# Altium PCB PowerSupplyV2.PcbDoc (part 4 of 4)
Units mm, origin at the board's own origin, x right, y up, seen from the top; angles counter-clockwise.
Board outline 28.17 x 37.01 mm, 2 copper layers (Top Layer, Bottom Layer), stack 0.971 mm thick; 117 components, 81 nets, 421 pads, 118 vias.
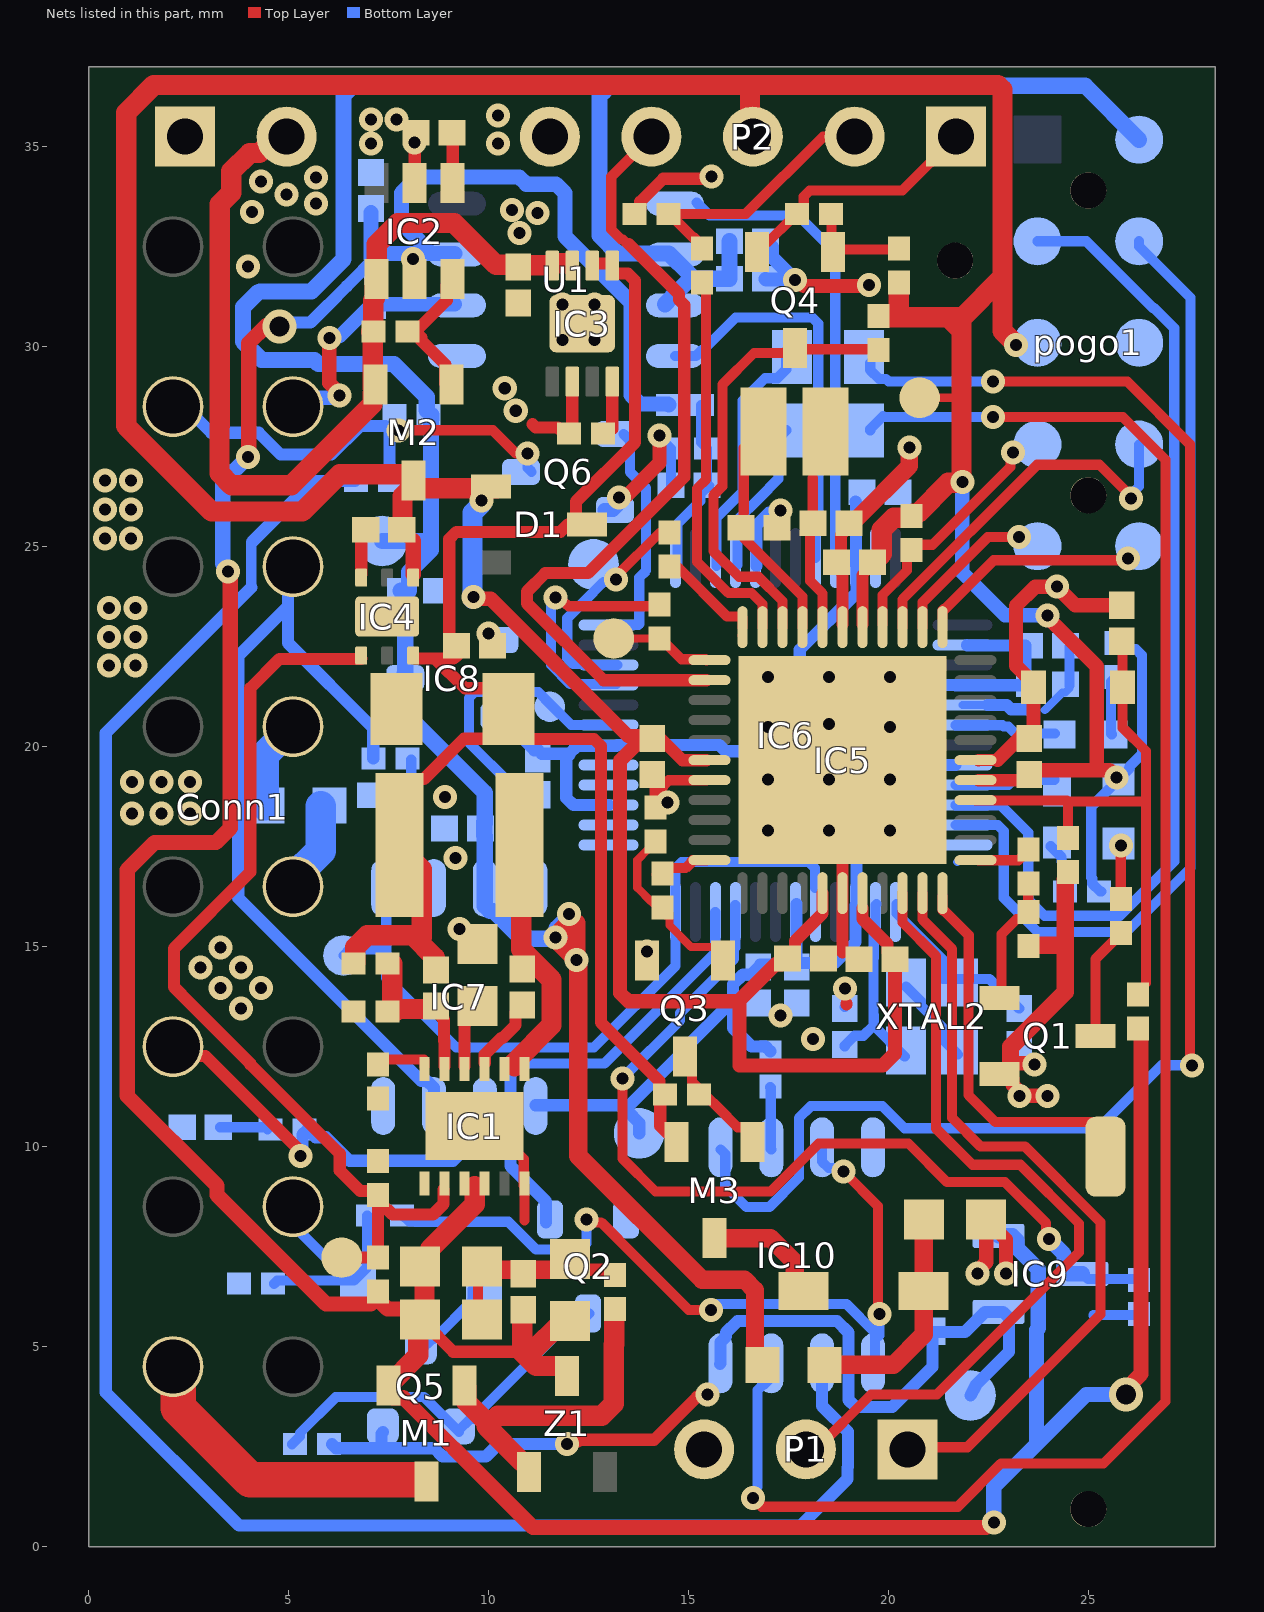
[diagram p2: the nets of this part, all layers, seen from the top]

## Part data (continued)
R33 R34: library part ERJ-2RHD1000X, "RES SMD 100 OHM 0.5% 1/16W 0402", Case Code (Imperial)=0402, Case Code (Metric)=1005, Manufacturer=Panasonic, Max Operating Temperature=125°C, Max Power Dissipation=63mW, Min Operating Temperature=-55°C, Package Quantity=10000, Resistance=100R, Resistance Tolerance=0.5%, Resistor Type="Thick Film", Supplier Part Number 1=667-ERJ-2RHD1000X, Temperature Coefficient=50ppm/°C, Voltage Rating=50V, Case/Package=0402, Category="Chip SMD Resistors", ComponentLink1Description=https://datasheet.ciiva.com/24071/aoa0000ce2-24071912.pdf?src-supplier=Mouser, ComponentLink1URL=https://datasheet.ciiva.com/24071/aoa0000ce2-24071912.pdf?src-supplier=Mouser, ComponentLink2Description=https://datasheet.ciiva.com/9119/aoa0000ce2-9119196.pdf?src-supplier=Avnet, ComponentLink2URL=https://datasheet.ciiva.com/9119/aoa0000ce2-9119196.pdf?src-supplier=Avnet, ComponentLink3Description=https://datasheet.ciiva.com/43511/aoa0000ce2-43511452.pdf?src-supplier=Onlinecomponents.com, ComponentLink3URL=https://datasheet.ciiva.com/43511/aoa0000ce2-43511452.pdf?src-supplier=Onlinecomponents.com, ComponentLink4Description=https://datasheet.ciiva.com/46438/1678782-46438252.pdf?src-supplier=Element14, ComponentLink4URL=https://datasheet.ciiva.com/46438/1678782-46438252.pdf?src-supplier=Element14, Contact Plating=Tin, Depth=0.5mm, Features="Automotive AEC-Q200", Height=0.35mm, Length=1mm, Manufacturer Part Number=ERJ-2RHD1000X, Mount="Surface Mount", Number of Terminations=2, Packaging="Tape and Reel", Power Rating=63mW, Pricing 1="1=0,10000, 10=0,09000, 50=0,09000, 100=0,03500, 1000=0,01600, 10000=0,01200 (USD)", Radiation Hardening=No, REACH SVHC="No SVHC", RoHS=Yes, RoHS Compliant=Yes, Series=ERJ, Stock 1=5726, Supplier 1=Mouser, Technology="THICK FILM", Termination=SMD/SMT, Tolerance=0.5%, Voltage Rating (DC)=50V, Width=0.5mm
R38 R39: library part RC0805FR-070RL, "Res Thick Film 0805 0 Ohm Epoxy Pad SMD T/R", Case Code (Imperial)=0805, Case Code (Metric)=2012, Manufacturer=Yageo, Max Operating Temperature=155°C, Max Power Dissipation=125mW, Min Operating Temperature=-55°C, Resistance=0mR, Resistor Type="Thick Film", Supplier Part Number 1=603-RC0805FR-070RL, Tolerance=1%, Case/Package=0805, Category="Chip SMD Resistors", ComponentLink1Description=https://datasheet.ciiva.com/17042/rc0805-17042698.pdf?src-supplier=Future+Electronics, ComponentLink1URL=https://datasheet.ciiva.com/17042/rc0805-17042698.pdf?src-supplier=Future+Electronics, ComponentLink2Description=https://datasheet.ciiva.com/15189/getdatasheetpartid-348154-15189885.pdf?src-supplier=Verical, ComponentLink2URL=https://datasheet.ciiva.com/15189/getdatasheetpartid-348154-15189885.pdf?src-supplier=Verical, Construction=Rectangular, Contact Plating=Tin,Matte, Depth=1.25mm, Features="Moisture Resistant", Lead Free="Lead Free", Length=2mm, Manufacturer Part Number=RC0805FR-070RL, Military Standard=Not, Number of Terminations=2, Packaging="Tape and Reel", Power Rating=125mW, Pricing 1="1=0,10000, 10=0,03400, 50=0,03400, 100=0,01300, 1000=0,00700, 10000=0,00400 (USD)", Radiation Hardening=No, RoHS=Yes, RoHS Compliant=Yes, Series=RC, Size Code=0805, Stock 1=103802, Supplier 1=Mouser
R40 R41: library part RC0402FR-07330RL, "Res Thick Film 0402 330 Ohm 1% 0.063W(1/16W) ±100ppm/C Pad SMD T/R", Case Code (Imperial)=0402, Case Code (Metric)=1005, Manufacturer=Yageo, Max Operating Temperature=155°C, Max Power Dissipation=63mW, Min Operating Temperature=-55°C, Package Quantity=1, Power Rating=62.5mW, Resistance=330R, Resistance Tolerance=1%, Resistor Type="Thick Film", Supplier Part Number 1=603-RC0402FR-07330RL, Temperature Coefficient=100ppm/°C, Voltage Rating=50V, Case/Package=0402, Category="Chip SMD Resistors", ComponentLink1Description=https://datasheet.ciiva.com/11819/0900766b80c66297-11819490.pdf?src-supplier=RSComponents, ComponentLink1URL=https://datasheet.ciiva.com/11819/0900766b80c66297-11819490.pdf?src-supplier=RSComponents, ComponentLink2Description=https://datasheet.ciiva.com/7849/1018594-7849962.pdf?src-supplier=Element14, ComponentLink2URL=https://datasheet.ciiva.com/7849/1018594-7849962.pdf?src-supplier=Element14, ComponentLink3Description=https://datasheet.ciiva.com/17083/pyu-rc0402-51-rohs-l-6-r-17083994.pdf?src-supplier=Future+Electronics, ComponentLink3URL=https://datasheet.ciiva.com/17083/pyu-rc0402-51-rohs-l-6-r-17083994.pdf?src-supplier=Future+Electronics, ComponentLink4Description=https://datasheet.ciiva.com/7849/1018594-7849963.pdf?src-supplier=Element14, ComponentLink4URL=https://datasheet.ciiva.com/7849/1018594-7849963.pdf?src-supplier=Element14, ComponentLink5Description=https://datasheet.ciiva.com/2453/pyu-r-int-thick-7-2453661.pdf?src-supplier=Digi-Key, ComponentLink5URL=https://datasheet.ciiva.com/2453/pyu-r-int-thick-7-2453661.pdf?src-supplier=Digi-Key, ComponentLink6Description=https://datasheet.ciiva.com/2453/pyu-r-int-thick-7-2453662.pdf?src-supplier=Digi-Key, ComponentLink6URL=https://datasheet.ciiva.com/2453/pyu-r-int-thick-7-2453662.pdf?src-supplier=Digi-Key, ComponentLink7Description=https://datasheet.ciiva.com/2453/pyu-r-int-thick-7-2453663.pdf?src-supplier=Digi-Key, ComponentLink7URL=https://datasheet.ciiva.com/2453/pyu-r-int-thick-7-2453663.pdf?src-supplier=Digi-Key, ComponentLink8Description=https://datasheet.ciiva.com/12656/pyu-rc0402-51-rohs-l-6-r-12656815.pdf?src-supplier=Mouser, ComponentLink8URL=https://datasheet.ciiva.com/12656/pyu-rc0402-51-rohs-l-6-r-12656815.pdf?src-supplier=Mouser, Construction=Rectangular, Depth=0.5mm, Features="Moisture Resistant", Height=0.016inch, Lead Free="Lead Free", Length=0.039inch, Manufacturer Part Number=RC0402FR-07330RL, Military Standard=Not, Number of Terminations=2, Packaging="Tape and Reel", Pricing 1="1=0,10000, 10=0,01200, 50=0,01200, 100=0,00400, 1000=0,00400, 10000=0,00300 (USD)", REACH SVHC=Unknown, RoHS=Yes, RoHS Compliant=Yes, Series=RC, Size Code=0402, Stock 1=904299, Supplier 1=Mouser, Technology="THICK FILM", Termination=SMD/SMT, Tolerance=1%, Width=0.02inch
U1: library part MCP2021-500E/SN, "LIN Transceiver with Integrated Vreg 5V 20kBd Automotive 8-Pin SOIC N", Case/Package=SOIC, Manufacturer=Microchip, Max Operating Temperature=125°C, Max Supply Current=1mA, Max Supply Voltage=18V, Min Operating Temperature=-40°C, Min Supply Voltage=6V, Package Quantity=100, Supplier Part Number 1=579-MCP2021-500E/SN, Category="Logic ICs", ComponentLink1Description=https://datasheet.ciiva.com/1700/22018f-1700070.pdf?src-supplier=Digi-Key, ComponentLink1URL=https://datasheet.ciiva.com/1700/22018f-1700070.pdf?src-supplier=Digi-Key, ComponentLink2Description=https://datasheet.ciiva.com/3036/22018e-3036758.pdf?src-supplier=Avnet, ComponentLink2URL=https://datasheet.ciiva.com/3036/22018e-3036758.pdf?src-supplier=Avnet, ComponentLink3Description=https://datasheet.ciiva.com/1506/1789202-1506521.pdf?src-supplier=Element14, ComponentLink3URL=https://datasheet.ciiva.com/1506/1789202-1506521.pdf?src-supplier=Element14, ComponentLink4Description=https://datasheet.ciiva.com/16500/filehandler-aspxddocname-en557254-16500153.pdf?src-supplier=Future+Electronics, ComponentLink4URL=https://datasheet.ciiva.com/16500/filehandler-aspxddocname-en557254-16500153.pdf?src-supplier=Future+Electronics, Height=1.25mm, Lead Free="Lead Free", Length=4.9mm, Manufacturer Part Number=MCP2021-500E/SN, Mount="Surface Mount", Nominal Supply Current=1mA, Number of Pins=8, Number of Receivers=1, Number of Transceivers=1, Number of Transmitters=1, Operating Supply Current=1mA, Packaging=Rail/Tube, Pricing 1="1=1,32000, 10=1,32000, 50=1,10000, 100=1,00000, 1000=1,00000, 10000=1,00000 (USD)", Radiation Hardening=No, REACH SVHC="No SVHC", RoHS=Yes, Stock 1=971, Supplier 1=Mouser, Supply Type=Single, Weight=0.005044oz, Width=3.9mm
XTAL1: library part XRCHA16M000F0A12R0, "Crystal 16MHz ±100ppm (Tol) ±100ppm (Stability) 8pF 100Ohm Automotive 2-Pin SMD T/R", Manufacturer=Murata, Supplier Part Number 1=81-XRCHA16M000F0A120, ComponentLink1Description=http://www.mouser.com/ds/2/281/p79e-806516.pdf?src-supplier=Mouser, ComponentLink1URL=http://www.mouser.com/ds/2/281/p79e-806516.pdf?src-supplier=Mouser, Manufacturer Part Number=XRCHA16M000F0A12R0, Pricing 1="1=0,65000, 10=0,57100, 50=0,51300, 100=0,45700, 1000=0,36500, 10000=0,30400 (USD)", RoHS=Yes, RoHS Compliant=Yes, Stock 1=50, Supplier 1=Mouser
XTAL2: library part ECS-120-10-36B-CWY-TR, "Crystal 12MHz ±10ppm (Tol) ±15ppm (Stability) 10pF FUND 130Ohm 4-Pin Mini-CSMD T/R", Manufacturer="ECS International", Supplier Part Number 1=520-120-10-36B-CWYT, Manufacturer Part Number=ECS-120-10-36B-CWY-TR, Pricing 1="1=0,43000, 10=0,36300, 50=0,32700, 100=0,29000, 1000=0,23200, 10000=0,20300 (USD)", RoHS=Yes, Stock 1=1709, Supplier 1=Mouser
Z1: library part BZX84C10LT1G, "ON SEMICONDUCTOR - BZX84C10LT1G - Zener Single Diode, 10 V, 225 mW, SOT-23, 6 %, 3 Pins, 150 °C", Breakdown Voltage=10.6V, Case/Package=SOT-23-3, Forward Voltage=900mV, Manufacturer="ON Semiconductor", Max Operating Temperature=150°C, Max Power Dissipation=225mW, Max Reverse Current=200nA, Min Operating Temperature=-65°C, Package Quantity=3000, Power Dissipation=300mW, Supplier Part Number 1=863-BZX84C10LT1G, Test Current=5mA, Tolerance=6%, Voltage Rating (DC)=10V, Zener Current=10mA, Category="Zener Diodes", ComponentLink1Description=https://datasheet.ciiva.com/18435/70100187-18435125.pdf?src-supplier=Allied+Electronics, ComponentLink1URL=https://datasheet.ciiva.com/18435/70100187-18435125.pdf?src-supplier=Allied+Electronics, ComponentLink2Description=https://datasheet.ciiva.com/894/bzx84c2v4lt1-d-894713.pdf?src-supplier=Digi-Key, ComponentLink2URL=https://datasheet.ciiva.com/894/bzx84c2v4lt1-d-894713.pdf?src-supplier=Digi-Key, ComponentLink3Description=https://datasheet.ciiva.com/894/bzx84c2v4lt1-d-894714.pdf?src-supplier=Digi-Key, ComponentLink3URL=https://datasheet.ciiva.com/894/bzx84c2v4lt1-d-894714.pdf?src-supplier=Digi-Key, ComponentLink4Description=https://datasheet.ciiva.com/8345/bzx84c2v4lt1-d-8345770.pdf?src-supplier=Avnet, ComponentLink4URL=https://datasheet.ciiva.com/8345/bzx84c2v4lt1-d-8345770.pdf?src-supplier=Avnet, ComponentLink5Description=https://datasheet.ciiva.com/894/bzx84c2v4lt1-d-894715.pdf?src-supplier=Digi-Key, ComponentLink5URL=https://datasheet.ciiva.com/894/bzx84c2v4lt1-d-894715.pdf?src-supplier=Digi-Key, ComponentLink6Description=https://datasheet.ciiva.com/16419/bzx84c2v4lt1-d-16419756.pdf?src-supplier=Future+Electronics, ComponentLink6URL=https://datasheet.ciiva.com/16419/bzx84c2v4lt1-d-16419756.pdf?src-supplier=Future+Electronics, ComponentLink7Description=https://datasheet.ciiva.com/8026/bzx84c2v4lt1-d-8026718.pdf?src-supplier=Element14, ComponentLink7URL=https://datasheet.ciiva.com/8026/bzx84c2v4lt1-d-8026718.pdf?src-supplier=Element14, ComponentLink8Description=https://datasheet.ciiva.com/16473/bzx84c2v4lt1-d-16473599.pdf?src-supplier=Avnet+Asia, ComponentLink8URL=https://datasheet.ciiva.com/16473/bzx84c2v4lt1-d-16473599.pdf?src-supplier=Avnet+Asia, ComponentLink9Description=https://datasheet.ciiva.com/22626/1874542-22626847.pdf?src-supplier=Element14, ComponentLink9URL=https://datasheet.ciiva.com/22626/1874542-22626847.pdf?src-supplier=Element14, Contact Plating=Tin,Matte, Element Configuration=Single, ESD Protection=Yes, Halogen Free="Halogen Free", Height=0.044inch, Impedance=20R, Lead Free="Lead Free", Length=0.119inch, Manufacturer Part Number=BZX84C10LT1G, Material=Plastic, Max Reverse Leakage Current=200nA, Number of Pins=3, Packaging="Tape and Reel", Power Rating=225mW, Pricing 1="1=0,13000, 10=0,09200, 50=0,09200, 100=0,03900, 1000=0,02700, 10000=0,01800 (USD)", Radiation Hardening=No, REACH SVHC="No SVHC", RoHS=Yes, RoHS Compliant=Yes, Stock 1=59638, Supplier 1=Mouser, Voltage Tolerance=6%, Width=0.055inch, Working Voltage=10V, Zener Voltage=10V
Z2: library part MM3Z3V9ST1G, "ON SEMICONDUCTOR - MM3Z3V9ST1G - Zener Single Diode, 3.9 V, 300 mW, SOD-323, 5 %, 2 Pins, 150 °C", Case/Package=SOD-323-2, Manufacturer="ON Semiconductor", Max Operating Temperature=150°C, Max Power Dissipation=200mW, Max Reverse Leakage Current=3uA, Min Operating Temperature=-65°C, Package Quantity=3000, Supplier Part Number 1=863-MM3Z3V9ST1G, Test Current=5mA, Tolerance=2%, Voltage Rating (DC)=3.9V, Voltage Tolerance=3%, Zener Voltage=4.025V, Category="Zener Diodes", ComponentLink1Description=https://datasheet.ciiva.com/899/mm3z2v4st1-d-899781.pdf?src-supplier=Digi-Key, ComponentLink1URL=https://datasheet.ciiva.com/899/mm3z2v4st1-d-899781.pdf?src-supplier=Digi-Key, Contact Plating=Tin,Matte, Element Configuration=Single, ESD Protection=Yes, Height=1mm, Impedance=90R, Lead Free="Lead Free", Length=1.8mm, Manufacturer Part Number=MM3Z3V9ST1G, Material=Plastic, Number of Pins=2, Packaging="Tape and Reel", Power Dissipation=200mW, Power Rating=200mW, Pricing 1="1=0,14000, 10=0,12500, 50=0,12500, 100=0,04400, 1000=0,03000, 10000=0,02000 (USD)", Radiation Hardening=No, RoHS=Yes, RoHS Compliant=Yes, Series=-, Stock 1=32042, Supplier 1=Mouser, Width=1.35mm

## Free pads (board coordinates)
  round 0.9 hole 0.9: 13(21.664,32.156) 13(24.994,0.941) 13(24.994,26.289) 13(24.994,33.909)
  round 1.016 smd: 14(6.329,7.231) 15(20.777,28.727) 16(13.132,22.708)
  round 0.762 smd far side: 20(11.532,21.005)
  round 1.016 smd far side: 21(6.375,14.783)
  round 1.27 smd far side: 22(22.047,3.785) 23(7.341,25.146) 24(13.767,10.338) 25(12.624,24.562)

## Via types
v1: diameter 0.6, hole 0.3, Top Layer to Bottom Layer, 113 vias
v2: diameter 0.61, hole 0.305, Top Layer to Bottom Layer, 3 vias
v3: diameter 0.85, hole 0.5, Top Layer to Bottom Layer, 2 vias

## Nets (pads, with @x,y where several pads share a name; then routed paths per layer and width w, separated by ;. In a path a pad name is that pad's centre, name@x,y a point inside that pad or via, vN(x,y) a via of type N, cw(c..) or ccw(c..) an arc to the next point about the centre after c; other vN are vias at no path point)
+12: Conn1.16 M1.3 | length 7.8
  Top Layer w0.889: Conn1.16@2.244,4.473 2.244,3.471 4.039,1.676 M1.3@8.255,1.676
BAT+: C9.2 IC2.1 IC3.3 IC3.4 M2.2 P3.2 R9.1 | length 23.8
  Top Layer w0.508: P3.2@4.953,35.255 4.685,35.255 4.273,34.844 4.025,34.844 3.569,34.388 3.569,33.855 3.28,33.565 3.28,28.022 3.277,28.018 3.277,26.841 3.574,26.543 5.073,26.543 7.098,28.568 7.098,28.843 7.169,28.914 7.109,28.974 7.109,30.332 7.063,30.378 7.069,30.378 7.115,30.424 7.115,30.722 ; 7.115,30.722 7.115,31.164 7.157,31.206 7.157,31.647 IC2.1@7.203,31.693 7.203,32.564 7.734,33.095 9.143,33.095 10.185,32.053 10.749,32.053 C9.2@10.795,32.007 ; C9.2@10.831,32.043 11.558,32.043 11.604,32.088 11.98,32.088 IC3.3@12.002,32.066
CAN-H: Conn1.6 IC7.7 R34.2 | length 20.8
  Bottom Layer w0.305: Conn1.6@5.108,24.504 4.986,24.381 4.986,23.512 ; R34.2@7.119,19.71 7.119,20.466 4.986,22.599 4.986,23.512 ; IC7.7@8.636,11.037 8.636,11.475 8.463,11.648 8.317,11.648 3.745,16.219 3.745,22.271 4.986,23.512
CAN-L: Conn1.14 IC7.6 R33.2 | length 10.8
  Top Layer w0.305: Conn1.14@2.108,12.504 2.341,12.271 2.918,12.271 5.294,9.895 v1(5.294,9.767)
  Bottom Layer w0.305: v1(5.294,9.767) 5.351,9.823 5.351,10.312 5.478,10.439 5.676,10.241 5.938,10.241 6.528,9.652 9.115,9.652 9.733,10.27 9.733,10.865 IC7.6@9.906,11.037
CAN-RX: IC6.43 IC7.4 pad.20 | length 9.6
  Bottom Layer w0.254: IC7.4@11.176,16.461 11.176,16.899 10.579,17.496 10.579,19.037 9.514,20.103 9.514,21.224 9.663,21.372 11.241,21.372 11.57,21.043 12.069,20.545 IC6.43@13.225,20.545
CAN-TX: IC6.29 IC6.36 IC7.1 pad.21 | length 18.7
  Bottom Layer w0.254: pad.21@6.375,14.783 6.521,14.929 6.899,14.929 6.905,14.935 7.444,14.935 ; IC7.1@7.366,16.461 7.444,16.383 7.444,14.935 ; IC6.36@14.674,15.87 14.674,16.971 14.823,17.12 18.009,17.12 18.158,16.971 IC6.29@18.158,16.471 ; IC6.36@14.677,15.87 14.677,14.524 12.638,12.486 9.187,12.486 7.444,14.228 7.444,14.935
DCEN: IC1.8 IC4.4 pad.14 R3.1 R5.2 | length 23.3
  Top Layer w0.305: pad.14@6.329,7.231 R3.1@7.239,7.232 ; IC4.4@6.818,22.208 6.809,22.2 4.775,22.2 4.041,21.466 4.041,16.868 2.134,14.961 2.134,13.993 2.554,13.573 4.045,12.081 4.045,12.064 6.281,9.828 6.281,9.405 6.794,8.893 7.091,8.893 7.239,8.745 7.239,8.448 7.462,8.448 7.598,8.311 8.613,8.311 8.875,8.573 IC1.8@8.875,8.933 ; R3.1@7.239,7.357 7.239,8.382
DEBTX: IC5.33 PAD1.1 | length 8.9
  Top Layer w0.254: IC5.33@21.35,16.266 21.35,15.916 21.373,15.893 21.406,15.893 22.006,15.293 22.006,14.15 21.998,14.142 21.998,11.292 22.673,10.617 25.095,10.617 PAD1.1@25.248,10.465
GND: C2.1 C3.2 C4.1 C5.1 C7.1 C8.1 C9.1 C10.1 C11.2 C12.2 C13.2 C14.2 C15.2 C16.1 C17.2 C18.1 C19.1 C20.1 C21.1 C22.1 C23.2 C24.2 C25.2 C26.1 C27.2 C28.1 C29.1 C30.1 C31.2 C32.1 C33.2 C34.2 C35.1 C36.1 C37.1 C38.2 Conn1.4 IC1.7 IC1.12 IC1.13 IC2.5 IC3.6 IC3.9 IC4.3 IC4.7 IC5.6 IC5.18 IC5.28 IC5.39 IC5.45 IC6.5 IC6.11 IC6.17 IC6.20 IC6.24 IC6.37 IC6.38 IC6.40 IC6.41 IC7.2 IC7.8 IC8.1 IC10.4 P1.3 P2.5 P3.1 pad.13 pogo1.6 Q1.2 Q2.2 Q3.2 Q6.2 R1.2 R4.1 R5.1 R6.1 R7.1 R8.1 R11.2 R14.1 R22.1 R23.1 R30.1 R36.1 R37.1 U1.5 XTAL2.2 XTAL2.4 Z2.2 | length 67.3
  Top Layer w0.254: C2.1@9.738,5.664 9.738,6.985 C3.2@9.797,6.925 ; IC1.13@10.652,9.916 10.879,9.689 10.879,9.039 10.902,9.016 10.902,8.16 ; C4.1@11.86,6.925 12.031,7.096 C4.1@11.966,7.096 ; 14.173,18.906 14.256,18.906 14.273,18.906 14.356,18.989 14.356,19.017 14.505,19.166 IC5.18@15.45,19.166 ; C18.1@19.027,25.537 19.15,25.659 19.2,25.71 C18.1@19.21,25.71
  Top Layer w0.305: IC4.3@6.818,24.308 6.818,25.312 C12.2@6.931,25.425 ; C10.1@8.111,35.357 8.153,35.315 v1(8.153,35.107) IC2.5@8.153,34.093 ; 11.1,28.067 11.182,27.985 11.736,27.985 11.884,27.837 11.947,27.837 12.094,27.985 IC3.6@12.094,29.079 ; C4.1@12.031,7.096 12.202,6.925 R7.1@13.284,6.925 ; R23.1@13.647,33.325 13.672,33.325 13.794,33.447 13.794,33.628 14.366,34.2 15.506,34.2 v1(15.57,34.265) ; R22.1@14.173,18.439 R22.1@14.173,18.489 14.173,18.906 C16.1@14.173,19.209 ; 14.199,18.849 14.256,18.906 ; 18.85,14.857 IC5.28@18.85,16.341 IC5.45@18.85,19.666 ; IC5.6@18.85,23.066 18.85,24.342 18.666,24.526 18.666,24.536 18.814,24.684 18.814,25.303 19.027,25.517 C18.1@19.027,25.537 ; 18.948,13.561 18.948,13.583 ; IC5.39@22.25,19.666 22.253,19.669 22.722,19.669
  Top Layer w0.356: v1(13.259,26.238) 13.306,26.285 13.46,26.285 14.275,27.1 v1(14.275,27.788) ; v1(17.665,31.669) 17.731,31.669 17.879,31.521 19.482,31.521 v1(19.507,31.547) ; C18.1@19.15,25.659 19.16,25.659 C18.1@19.21,25.71 ; v1@20.519,27.479 v1(20.523,27.483) ; v1(22.225,6.833) 22.225,6.899 22.441,7.115 C21.1@22.441,8.179 22.936,7.684 v1(22.936,6.833) ; 22.722,19.669 23.337,20.284 C13.2@23.337,20.311 ; Q1.2@22.867,11.826 22.978,11.826 23.1,11.704 23.1,11.552 23.231,11.421 23.231,11.323 v1(23.278,11.276) ; Q1.2@23.051,12.01 23.13,12.089 23.618,12.089 v1(23.653,12.055) ; v1@23.375,11.276 v1(23.978,11.276) ; C13.2@23.565,20.311 23.627,20.373 Z2.2@23.627,21.488 23.627,21.588 23.19,22.025 23.19,23.525 23.668,24.003 24.205,24.003 v1(24.207,24.005) ; v1@24.206,24.003 24.671,23.539 C14.2@25.832,23.539
  Top Layer w0.432: C18.1@19.21,25.71 20.519,27.019 v1@20.519,27.479 ; Q1.2@22.867,11.826 23.051,12.01 23.051,12.502 24.419,13.87 24.419,15.113 ; R14.1@23.495,15.041 24.347,15.041 24.419,15.113 ; R11.2@24.486,16.747 24.419,16.681 24.419,15.113
  Top Layer w0.457: C3.2@9.797,6.925 C4.1@11.86,6.925
  Top Layer w0.762: Conn1.4@5.108,16.298 Conn1.4@5.108,16.504
  Bottom Layer w0.152: 21.692,17.12 21.717,17.094
  Bottom Layer w0.203: IC6.17@21.849,21.045 IC6.17@22.48,21.045 ; 23.907,20.919 24.345,21.356 24.419,21.356 24.528,21.465 C24.2@24.528,21.539
  Bottom Layer w0.254: v1(14.275,27.788) 14.275,27.744 14.561,27.457 14.561,26.558 C35.1@14.602,26.518 ; C30.1@18.905,13.496 C30.1@18.907,13.495 ; XTAL2.4@20.435,14.012 20.805,13.641 20.805,13.532 21.359,12.978 21.359,12.687 XTAL2.2@21.735,12.312 ; C24.2@24.528,21.539 C32.1@24.528,22.53 ; 25.121,5.791 25.128,5.798 R37.1@26.264,5.798
  Bottom Layer w0.305: IC6.5@16.7,24.52 16.7,25.541 17.012,25.853 17.239,25.853 v1(17.296,25.909) ; 20.117,18.796 20.117,18.923 20.738,19.545 IC6.20@21.675,19.545 ; IC6.17@22.48,21.045 22.957,21.045 23.061,20.94 23.627,20.94
  Bottom Layer w0.356: Q6.2@12.899,25.923 13.109,25.923 13.212,26.026 13.212,26.191 v1(13.259,26.238) ; C29.1@16.927,31.699 16.943,31.684 v1@17.65,31.684 ; C20.1@16.927,32.639 16.947,32.639 17.09,32.497 17.09,32.244 v1@17.65,31.684 ; v1(17.665,31.669) v1@17.65,31.684
  Bottom Layer w0.762: Conn1.4@5.108,16.504 5.108,16.708 5.805,17.406 R1.2@5.805,18.517
  other v1: 18.11,12.7 17.297,13.284 3.81,13.462 18.907,13.955 3.302,13.97 4.318,13.97 2.794,14.478 3.81,14.478 13.96,14.883 3.302,14.986 9.271,15.451 9.169,17.221 16.993,17.907 18.517,17.907 20.041,17.907 1.092,18.339 1.829,18.339 2.54,18.339 14.473,18.614 8.915,18.745 1.092,19.126 1.829,19.126 2.54,19.126 16.993,19.185 18.517,19.185 20.041,19.185 16.993,20.493 20.04,20.493 18.517,20.574 16.993,21.742 18.517,21.742 20.041,21.742 0.508,22.028 1.168,22.028 0.508,22.749 1.168,22.749 0.508,23.47 1.168,23.47 0.406,25.213 1.067,25.213 0.406,25.933 1.067,25.933 0.406,26.654 1.067,26.654 11.856,30.175 12.649,30.175 11.856,31.064 12.649,31.064 3.988,32.004 10.77,32.842 11.227,33.35 4.089,33.376 10.592,33.424 5.69,33.579 4.953,33.807 4.318,34.138 5.69,34.239 7.061,35.077 10.236,35.077 7.061,35.687 7.696,35.687 10.236,35.789
  other v2: 9.999,22.834 10.683,28.404 10.406,28.963
GPS_TX: IC5.13 P2.4 | length 20.4
  Top Layer w0.254: 13.506,32.573 13.47,32.573 13.36,32.683 13.318,32.683 13.067,32.934 13.067,34.251 P2.4@14.072,35.255
  Top Layer w0.305: 13.506,32.573 14.762,31.318 14.762,31.178 14.892,31.048 14.892,26.745 12.489,24.342 11.419,24.342 10.96,23.883 10.96,23.584 12.878,21.666 IC5.13@15.45,21.666
GPSPWRCTRL: IC5.32 P1.1 | length 19.2
  Top Layer w0.254: P1.1@20.472,2.438 20.523,2.489 21.971,2.489 25.298,5.817 25.298,8.119 23.405,10.012 22.297,10.012 21.59,10.719 21.59,14.943 20.853,15.68 IC5.32@20.853,15.938 ; IC5.32@20.85,16.341 20.852,16.339 IC5.32@20.852,15.939
J1850+: Conn1.2 D2.2 R29.1 R30.2 | length 6
  Bottom Layer w0.254: R30.2@4.641,6.579 4.717,6.655 6.38,6.655 D2.2@6.502,6.655 ; Conn1.2@4.928,8.23 D2.2@6.502,6.655 ; R29.1@6.967,8.28 6.967,6.992 6.63,6.655 D2.2@6.502,6.655
J1850-: Conn1.10 Q6.3 R26.1 R28.1 | length 11.6
  Top Layer w0.254: v1(7.747,27.915) 10.109,27.915 10.693,27.33 v1(10.973,27.33)
  Bottom Layer w0.254: v1(10.973,27.33) 10.973,26.979 Q6.3@11.079,26.873
  Bottom Layer w0.305: Conn1.10@2.112,28.506 2.416,28.506 3.068,27.854 4.255,27.854 4.804,27.305 6.07,27.305 6.787,28.022 7.425,28.022 7.466,27.981 v1@7.526,27.981 ; R28.1@7.675,26.873 7.526,27.022 v1@7.526,27.981 ; v1(7.747,27.915) 7.681,27.981 v1@7.526,27.981
K-LINE: Conn1.7 R32.1 U1.6 | length 6.8
  Top Layer w0.356: v1(6.02,30.226) 6.02,29.098 6.274,28.844 v1(6.274,28.778)
  Bottom Layer w0.254: Conn1.7@5.108,28.504 Conn1.7@5.351,28.747 ; R32.1@7.061,31.124 R32.1@7.121,31.064
  Bottom Layer w0.356: Conn1.7@5.108,28.504 5.332,28.728 6.157,28.728 6.208,28.778 v1(6.274,28.778) ; v1(6.02,30.226) 6.067,30.273 6.286,30.273 7.061,31.049 R32.1@7.061,31.124 ; R32.1@7.121,31.064 U1.6@9.156,31.064
KEETLED: IC5.34 R13.1 | length 1.3
  Top Layer w0.254: IC5.34@22.25,17.166 23.25,17.166 R13.1@23.495,17.412
LED-G: IC6.18 LED3.1 | length 2.6
  Bottom Layer w0.254: IC6.18@21.68,20.54 22.851,20.54 22.882,20.508 22.996,20.508 23.172,20.332 LED3.1@24.154,20.332
LED-R: IC6.21 LED2.1 | length 2.5
  Bottom Layer w0.254: IC6.21@21.675,19.045 22.993,19.045 23.126,19.177 LED2.1@24.142,19.177
MISO: IC5.2 pogo1.9 | length 3.7
  Top Layer w0.254: IC5.2@20.85,22.991 20.852,22.993 20.852,23.613 22.482,25.243 v1(23.266,25.243)
MOSI: IC5.1 pogo1.10 | length 5.5
  Top Layer w0.254: IC5.1@21.35,23.066 21.35,23.416 21.373,23.439 21.406,23.439 22.63,24.663 25.933,24.663 v1(25.984,24.714)
NetC1_1: C1.1 IC1.3 | length 1.7
  Top Layer w0.305: IC1.3@9.904,12.098 9.904,12.309 10.316,12.72 10.354,12.72 10.678,13.044 10.678,13.358 10.683,13.362 C1.1@10.771,13.362
NetC1_2: C1.2 IC1.1 IC1.2 L1.1 | length 6.6
  Top Layer w0.305: L1.1@10.465,18.161 L1.1@10.693,17.933
  Top Layer w0.508: 10.652,12.016 10.652,12.117 11.572,13.037 11.572,14.183 10.821,14.935 10.821,17.298 L1.1@10.821,17.551
NetC6_1: C6.1 IC1.5 R2.1 R6.2 | length 3.9
  Top Layer w0.305: C6.1@8.687,13.42 8.787,13.42 8.844,13.362 8.844,13.229 8.89,13.184 8.89,12.649 8.9,12.64 8.9,12.018 IC1.5@8.902,12.016
  Top Layer w0.508: R2.1@7.595,14.58 7.595,13.386 7.67,13.386 7.729,13.445 C6.1@8.687,13.445
NetC8_2: C8.2 IC1.4 | length 1.7
  Top Layer w0.305: IC1.4@9.402,12.016 9.402,13.077 9.461,13.136 9.461,13.352 9.496,13.387 C8.2@9.779,13.387
NetC10_2: C10.2 IC2.4 | length 1.3
  Top Layer w0.305: IC2.4@9.119,34.108 IC2.4@9.103,34.093 9.103,35.149 9.154,35.199 9.154,35.299 C10.2@9.211,35.357
NetC14_1: C14.1 IC5.37 R10.2 R11.1 Z2.1 | length 13.9
  Top Layer w0.254: IC5.37@22.175,18.666 22.177,18.664 22.577,18.664 22.58,18.662 24.464,18.662 24.486,18.64 24.486,18.637 ; R11.1@24.486,17.722 24.486,18.637 ; C14.1@25.832,22.639 25.852,22.618 Z2.1@25.852,21.488 25.852,20.479 26.435,19.896 26.435,18.637 R10.2@26.435,14.097 ; 26.398,18.637 24.486,18.637
NetC18_2: C18.2 IC5.7 XTAL1.2 | length 3.9
  Top Layer w0.254: 18.107,26.72 18.107,25.527 18.036,25.456 18.036,24.15 18.349,23.837 18.349,22.992 IC5.7@18.35,22.991
NetC19_2: C19.2 IC5.8 XTAL1.1 | length 5.7
  Top Layer w0.254: XTAL1.1@16.7,27.788 16.38,27.467 16.38,25.859 16.375,25.854 16.375,25.7 16.202,25.527 16.375,25.354 16.375,25.23 17.848,23.757 17.848,22.993 IC5.8@17.85,22.991
NetC21_2: C21.2 D3.1 R42.1 | length 5.7
  Top Layer w0.457: R42.1@18.403,4.55 20.12,4.55 20.88,5.31 C21.2@20.88,8.21
NetC28_2: C28.2 IC6.25 XTAL2.1 | length 4.6
  Bottom Layer w0.254: IC6.25@20.2,16.07 20.2,15.837 21.359,14.678 21.359,14.202 21.362,14.2 22.521,14.2 C28.2@23.266,13.455
NetC30_2: C30.2 IC6.26 XTAL2.3 | length 5.1
  Bottom Layer w0.254: C30.2@18.907,12.515 18.907,12.535 19.15,12.778 19.371,12.778 19.627,13.034 XTAL2.3@20.407,12.255 ; 19.629,13.032 19.629,13.289 19.627,13.291 19.627,14.723 19.629,14.725 19.629,15.304 19.677,15.351 19.677,16.047 IC6.26@19.7,16.07
NetC33_1: C33.1 R33.1 | length 1.2
  Bottom Layer w0.254: C33.1@3.294,10.49 4.428,10.49 R33.1@4.478,10.439
NetC34_1: C34.1 R34.1 | length 0.9
  Bottom Layer w0.254: C34.1@8.069,18.786 R34.1@8.069,19.685
NetC35_2: C35.2 IC6.1 R35.1 R36.2 | length 4.5
  Bottom Layer w0.254: IC6.1@14.7,24.52 14.723,24.543 14.723,25.573 15.299,26.149 15.299,26.325 15.492,26.518 15.522,26.518 15.461,26.578 15.461,27.457 15.312,27.607 R35.1@15.312,28.55
NetConn1_5: Conn1.5 R1.1 | length 2.3
  Bottom Layer w0.711: R1.1@4.405,18.517 4.405,19.801 Conn1.5@5.108,20.504
NetD2_1: D2.1 Q5.3 | length 2.7
  Bottom Layer w0.254: Q5.3@8.314,4.869 8.314,4.919 8.587,5.192 8.637,5.192 9.607,6.162 9.607,6.432 9.83,6.655 D2.1@10.08,6.655
NetD3_2: D3.2 M3.3 | length 3.1
  Top Layer w0.457: M3.3@15.654,7.716 17.049,7.716 17.657,7.108 17.657,6.624 D3.2@17.88,6.401
NetIC1_6: IC1.6 R4.2 | length 1.3
  Top Layer w0.254: R4.2@7.239,12.183 8.379,12.183 8.402,12.16 IC1.6@8.402,12.016
NetIC2_3: IC2.3 M2.1 R9.2 | length 3.6
  Top Layer w0.305: R9.2@8.094,30.378 R9.2@8.169,30.378 ; M2.1@9.089,28.914 8.917,29.086 8.917,29.556 8.316,30.156 8.316,30.231 R9.2@8.169,30.378 ; IC2.3@9.103,31.693 8.956,31.545 8.956,31.165 R9.2@8.169,30.378
NetIC3_8: IC3.8 R8.2 | length 1.1
  Top Layer w0.305: R8.2@13.092,27.945 IC3.8@13.092,29.028
NetIC5_9: IC5.9 Q4.3 R21.1 | length 11.6
  Top Layer w0.254: IC5.9@17.35,22.991 17.348,22.993 17.348,23.648 16.744,24.252 16.261,24.252 15.62,24.893 15.62,26.289 15.846,26.514 15.846,29.054 16.637,29.845 17.244,29.845 17.392,29.846 17.665,30.119 17.665,30.169 17.893,29.941 R21.1@19.748,29.941
NetIC5_10: IC5.10 R19.2 | length 9.7
  Top Layer w0.254: R19.2@15.342,31.554 15.439,31.457 15.439,26.682 15.214,26.457 15.214,24.628 15.996,23.846 16.576,23.846 16.85,23.571 IC5.10@16.85,22.991
NetIC5_11: IC5.11 R24.2 | length 2.8
  Top Layer w0.203: IC5.11@16.329,22.784 16.35,22.805 IC5.11@16.35,22.991
  Top Layer w0.254: R24.2@14.526,24.509 14.715,24.509 15.968,23.256 16.327,23.256 16.35,23.233 IC5.11@16.35,22.991
NetIC5_12: IC5.12 pad.16 R25.2 | length 2.6
  Top Layer w0.203: pad.16@13.132,22.708 R25.2@14.268,22.708
  Top Layer w0.254: R25.2@14.268,22.708 R25.2@14.275,22.714 ; R25.2@14.275,22.764 14.275,22.739 14.825,22.189 15.427,22.189 IC5.12@15.45,22.166
NetIC6_3: IC6.3 R39.2 | length 6.1
  Bottom Layer w0.254: IC6.3@15.7,24.52 15.7,25.726 16.358,26.384 16.358,28.66 16.913,29.215 17.218,29.215 17.441,29.438 R39.2@17.441,29.743
NetIC6_4: IC6.4 R38.2 | length 3.9
  Bottom Layer w0.254: IC6.4@16.223,24.543 16.223,25.675 16.764,26.216 17.247,26.698 17.247,27.72 R38.2@17.441,27.915
NetIC6_8: IC6.8 U1.4 | length 9.9
  Bottom Layer w0.254: U1.4@14.663,29.769 15.182,29.769 15.345,29.933 15.379,29.933 16.181,30.734 18.095,30.734 18.244,30.585 18.244,25.406 18.174,25.337 IC6.8@18.174,24.72
NetIC6_9: IC6.9 U1.1 | length 11.6
  Bottom Layer w0.254: U1.1@15.204,33.604 15.527,33.281 17.748,33.281 18.669,32.36 18.669,25.353 18.669,24.725 IC6.9@18.674,24.72
NetIC10_1: IC10.1 R39.1 | length 40.1
  Top Layer w0.254: v1@22.657,29.134 25.968,29.134 27.534,27.568 27.534,12.09 v1(27.584,12.04)
  Bottom Layer w0.254: IC10.1@15.799,9.938 15.917,9.82 15.917,9.025 16.449,8.493 17.019,8.493 17.759,9.233 17.759,10.722 18.054,11.017 19.849,11.017 19.995,10.871 20.401,10.465 25.248,10.465 26.822,12.04 v1(27.584,12.04) ; R39.1@19.541,29.593 19.541,29.418 19.764,29.195 19.939,29.195 20.001,29.134 v1@22.657,29.134
  other v1: 22.606,29.134
NetIC10_2: IC10.2 R31.2 | length 1.6
  Bottom Layer w0.254: R31.2@17.043,11.488 17.056,11.475 17.056,9.95 IC10.2@17.069,9.938
NetIC10_3: IC10.3 IC10.5 R29.2 | length 20.3
  Top Layer w0.254: v1(12.446,8.179) 12.512,8.113 12.815,8.113 13.712,7.216 15.006,5.921 v1(15.564,5.921) ; v1(18.873,9.381) 19.736,8.518 19.736,5.859 v1(19.769,5.826)
  Bottom Layer w0.254: R29.2@7.867,8.28 8.015,8.132 8.159,8.132 8.164,8.128 10.497,8.128 11.194,7.431 12.297,7.431 12.446,7.58 v1(12.446,8.179) ; v1@15.621,6.074 18.945,6.074 19.66,5.359 IC10.5@19.66,5.182 ; IC10.3@18.339,9.988 18.339,9.631 18.499,9.471 18.689,9.471 18.779,9.381 v1(18.873,9.381) ; IC10.5@19.609,4.638 19.66,4.688 IC10.5@19.66,5.182 ; v1(19.769,5.826) 19.769,5.291 IC10.5@19.66,5.182
NetIC10_6: IC10.6 R28.2 | length 49.5
  Bottom Layer w0.254: 4.067,23.98 4.067,25.121
  Bottom Layer w0.305: 4.067,23.98 0.432,20.345 0.432,3.861 3.759,0.533 17.805,0.533 18.971,1.699 18.971,1.985 18.987,2.001 18.987,2.875 18.339,3.524 IC10.6@18.339,4.588 ; 4.089,25.121 5.613,26.645 R28.2@6.662,26.645
NetIC10_7: IC10.7 R38.1 | length 46
  Top Layer w0.254: 16.828,1.003 21.729,1.003 22.809,2.083 25.375,2.083 26.924,3.632 26.924,27.178 25.857,28.245 v1(22.606,28.245)
  Bottom Layer w0.254: v1@16.723,1.494 16.723,3.916 16.872,4.065 16.896,4.065 17.069,4.238 IC10.7@17.069,4.638 ; R38.1@19.541,27.915 19.541,27.947 19.864,28.27 19.89,28.245 v1(22.606,28.245)
  other v1: 16.612,1.219
NetLED1_1: LED1.1 R12.2 | length 1.3
  Top Layer w0.254: R12.2@25.806,16.223 v1(25.806,17.539)
NetLED2_2: LED2.2 R40.2 | length 1.3
  Bottom Layer w0.254: LED2.2@24.054,17.513 24.327,17.24 24.327,17.13 24.366,17.091 R40.2@24.366,16.383
NetLED3_2: LED3.2 R41.2 | length 1.5
  Bottom Layer w0.254: LED3.2@25.58,20.314 25.565,20.328 25.565,21.627 R41.2@25.679,21.741
NetM1_1: M1.1 R7.2 Z1.1 | length 8.5
  Top Layer w0.508: M1.1@9.401,4.037 9.447,3.991 9.447,3.622 10.007,3.061 ; Z1.1@11.008,2.073 10.962,2.119 10.843,2.119 9.954,3.008 10.226,3.28 12.834,3.28 13.132,3.577 13.132,5.055 13.14,5.063 13.14,5.933 R7.2@13.157,5.95
NetM3_1: M3.1 Q3.3 R16.1 | length 2.9
  Top Layer w0.254: Q3.3@14.91,12.462 15.083,12.289 15.083,11.632 15.475,11.239 15.475,11.238 15.739,10.973 16.224,10.489 16.556,10.489 M3.1@16.608,10.438
NetQ1_1: Q1.1 R13.2 R14.2 | length 3.2
  Top Layer w0.254: Q1.1@22.825,13.726 22.825,15.319 23.202,15.695 23.347,15.695 23.495,15.843 R13.2@23.495,16.612
NetQ1_3: Q1.3 R12.1 | length 3.2
  Top Layer w0.254: Q1.3@24.875,12.776 Q1.3@25.178,12.776 ; Q1.3@25.089,12.865 25.089,12.867 25.171,12.949 25.171,14.688 R12.1@25.806,15.323 ; Q1.3@25.178,12.924 Q1.3@25.178,13.072
NetQ2_3: Q2.3 Q5.1 R27.1 | length 9.5
  Bottom Layer w0.254: R27.1@5.088,2.565 5.286,2.763 5.286,2.848 6.181,3.743 8.39,3.743 8.941,3.192 8.951,3.192 9.264,2.88 Q5.1@9.264,2.869 ; Q5.1@9.264,2.919 9.537,3.192 9.587,3.192 12.078,5.683 12.373,5.683 Q2.3@12.522,5.833
NetQ3_1: Q3.1 R18.2 R22.2 | length 4.9
  Top Layer w0.203: R22.2@14.173,17.664 14.173,17.614 14,17.44 13.986,17.44 13.72,17.174 13.72,16.478 14.066,16.132 14.075,16.132 14.291,15.916 14.422,15.785 14.524,15.785 14.524,15.539 15.066,14.998 15.661,14.998 15.91,14.749 Q3.1@15.91,14.462
  Top Layer w0.254: R18.2@14.351,15.983 14.351,15.977 R18.2@14.499,15.829
NetQ4_1: Q4.1 R17.1 R20.2 | length 3
  Top Layer w0.254: R20.2@18.499,33.328 18.571,33.255 18.571,32.213 18.615,32.169 18.615,32.259 18.788,32.432 R17.1@20.259,32.432
NETRX: P2.2 R19.1 R23.2 | length 6.5
  Top Layer w0.254: R23.2@14.447,33.325 14.57,33.325 14.644,33.325 16.434,33.325 18.364,35.255 P2.2@19.152,35.255 ; R23.2@14.644,33.202 15.119,32.727 15.144,32.727 15.342,32.529 R19.1@15.342,32.504
NETTX: P2.1 Q4.2 R20.1 | length 6
  Top Layer w0.254: Q4.2@16.988,32.621 17.586,33.218 17.588,33.218 17.695,33.325 17.734,33.325 17.881,33.473 17.881,33.76 18.03,33.909 20.345,33.909 P2.1@21.692,35.255
OBDPWRCTRL: IC5.22 R18.1 | length 1.4
  Top Layer w0.254: R18.1@14.199,16.808 14.297,16.906 14.385,16.906 14.445,16.967 14.929,16.967 15.077,17.116 15.077,17.143 15.1,17.166 IC5.22@15.45,17.166
OBDRX: IC6.45 R25.1 | length 6.3
  Top Layer w0.254: v1(11.67,23.738) 11.764,23.738 11.943,23.558 11.954,23.558 11.998,23.514 R25.1@14.275,23.514
  Bottom Layer w0.254: v1(11.67,23.738) 11.67,23.644 11.564,23.538 11.564,22.048 12.044,21.567 IC6.45@13.202,21.567
OBDTX: IC6.46 pad.25 R24.1 | length 5.9
  Top Layer w0.254: v1(13.187,24.186) 13.187,24.262 14.273,25.347 14.431,25.347 14.529,25.445 R24.1@14.529,25.47
  Bottom Layer w0.254: v1(13.187,24.186) 13.121,24.12 12.871,24.12 12.405,23.653 11.97,23.218 11.97,22.216 12.119,22.068 12.359,22.068 12.382,22.045 IC6.46@13.225,22.045
OBDV5V: C20.2 C29.2 C37.2 C38.1 IC7.3 IC8.3 pad.23 pogo1.2 R26.2 R42.2 U1.2 U1.3 | length 78.4
  Top Layer w0.457: v1@12.003,15.797 12.042,15.758 12.042,15.742 12.197,15.587 v1(12.197,14.671) ; v1(12.014,15.824) 11.987,15.797 11.987,15.588 11.67,15.271 v1(11.67,15.232) 11.67,15.198 v1(12.197,14.671) ; R42.2@16.853,4.55 16.662,4.74 16.662,6.412 16.395,6.68 15.335,6.68 12.243,9.772 12.243,14.524 12.225,14.543 12.225,14.644 v1(12.197,14.671)
  Bottom Layer w0.406: pad.23@7.341,25.146 8.515,25.146 8.56,25.191 ; C38.1@7.805,23.901 7.918,23.788 IC8.3@7.918,21.717 ; IC8.3@7.891,21.793 7.891,20.866 9.906,18.851 9.906,18.075 C37.2@9.89,18.075 ; C38.1@8.009,23.901 8.009,24.369 8.56,24.919 8.56,25.191 ; R26.2@8.458,28.415 8.458,28.747 7.635,29.571 5.748,29.571 5.647,29.672 4.323,29.672 3.861,30.134 3.861,30.993 4.227,31.359 4.254,31.359 4.281,31.386 5.571,31.386 5.573,31.388 5.575,31.388 6.375,32.189 6.375,36.287 6.613,36.525 12.725,36.525 ; R26.2@8.577,28.296 8.577,28.191 8.56,28.174 8.56,25.191 ; C37.2@9.89,17.78 C37.2@9.89,18.119 ; C37.2@9.906,17.78 IC7.3@9.906,16.474 9.906,16.024 10.031,15.899 10.123,15.899 10.821,15.201 11.667,15.201 v1(12.197,14.671) 12.197,14.723 12.09,14.83 12.09,15.611 12.051,15.65 12.051,15.735 v1@12.014,15.772 ; v1(11.67,15.232) 11.707,15.269 11.707,15.465 v1@12.014,15.772 ; v1(12.014,15.824) v1@12.014,15.772 ; U1.3@14.413,31.064 14.572,31.224 14.572,31.233 15.039,31.699 15.039,31.802 ; C20.2@16.027,32.639 C29.2@16.027,31.699 15.141,31.699 15.039,31.802 ; pogo1.2@26.264,35.179 24.917,36.525 12.878,36.525 12.725,36.525 ; 12.725,36.525 12.878,36.373 12.776,36.271 12.776,32.782 13.224,32.334 14.506,32.334 15.039,31.802
P0_1: IC6.34 Q2.1 | length 11.6
  Bottom Layer w0.254: 10.546,12.054 10.572,12.079 12.892,12.079 15.669,14.857 15.669,15.865 IC6.34@15.674,15.87
  Bottom Layer w0.305: 10.546,12.054 10.546,10.149 10.546,9.52 11.436,8.63 Q2.1@11.436,8.108
P0_5: IC6.33 IC9.3 R37.2 | length 23.1
  Top Layer w0.254: v1(13.346,11.713) 13.346,9.712 14.172,8.885 17.053,8.885 18.252,10.084 20.498,10.084 21.463,9.119 22.911,9.119 23.941,8.089 23.941,7.767 v1(24.007,7.7)
  Bottom Layer w0.254: v1(13.346,11.713) 14.791,13.158 14.791,13.35 16.139,14.699 16.139,14.952 16.169,14.982 16.169,16.039 IC6.33@16.174,16.043 ; IC9.3@24.85,6.833 24.984,6.698 R37.2@26.264,6.698
  Bottom Layer w0.381: v1(24.007,7.7) 24.39,7.318 24.39,6.934 24.499,6.824 IC9.3@24.849,6.824
P0_29: IC6.48 Q6.1 | length 5.6
  Bottom Layer w0.254: IC6.48@13.225,23.045 13.744,23.045 13.767,23.068 13.767,24.232 13.941,24.405 13.941,26.471 13.534,26.878 13.534,27.661 Q6.1@13.372,27.823
PWRKEY: IC5.31 P1.2 | length 20.4
  Top Layer w0.254: P1.2@17.932,2.438 18.192,2.438 19.564,3.81 21.209,3.81 24.761,7.362 24.761,8.082 23.292,9.55 22.098,9.55 21.184,10.465 21.184,14.775 20.351,15.608 IC5.31@20.351,16.341
RST: IC5.4 pogo1.7 R15.2 | length 5.9
  Top Layer w0.254: IC5.4@19.85,23.066 19.85,23.795 20.462,24.407 20.462,24.785 20.574,24.897 20.731,25.054 21.098,25.054 22.423,26.379 23.048,27.004 23.048,27.29 v1(23.114,27.356)
SCK: IC5.3 pogo1.8 | length 9.6
  Top Layer w0.254: IC5.3@20.35,22.991 20.351,23.686 23.715,27.051 25.273,27.051 v1@26.06,26.264
  Bottom Layer w0.254: v1(26.06,26.213) 26.06,26.306 26.264,26.51 pogo1.8@26.264,27.559
USART0_RX: IC6.22 pogo1.4 | length 25.8
  Bottom Layer w0.254: IC6.22@21.675,18.545 21.68,18.54 22.81,18.54 23.495,17.854 23.495,16.184 23.9,15.779 25.782,15.779 27.143,17.14 27.143,30.463 26.628,30.978 26.603,30.978 24.943,32.639 pogo1.4@23.724,32.639
USART0_TX: IC6.23 pogo1.3 | length 24.8
  Bottom Layer w0.254: IC6.23@21.675,18.045 22.73,18.045 22.879,17.896 22.879,16.226 23.732,15.372 25.95,15.372 27.549,16.971 27.549,31.226 26.264,32.512 pogo1.3@26.264,32.639
V3V3: C23.1 C24.1 C25.1 C27.1 C31.1 C32.2 IC6.10 IC6.14 IC6.16 IC6.27 IC6.30 IC6.39 IC6.42 IC7.5 IC8.2 pad.24 R31.1 | length 46.1
  Bottom Layer w0.305: IC8.2@10.502,20.941 10.502,20.555 11.141,19.916 11.241,19.916 11.328,19.829 12.019,19.829 ; IC7.5@11.176,11.037 13.485,11.037 ; IC6.39@12.999,18.545 12.123,18.545 11.945,18.723 11.945,19.729 12.019,19.804 12.019,19.829 ; pad.24@13.767,10.338 13.767,10.599 13.485,10.881 13.485,11.037 ; R31.1@17.043,12.388 16.924,12.507 16.576,12.507 16.114,12.969 16.114,14.062 ; IC6.30@17.7,16.07 17.7,14.6 C25.1@17.704,14.596 ; C23.1@19.177,26.134 19.188,26.122 19.188,24.531 19.2,24.52 19.2,23.848 17.78,22.428 17.78,19.888 ; IC6.14@21.962,22.545 21.97,22.537 23.42,22.537 23.428,22.53 23.425,22.527 23.425,21.542 21.678,21.542 21.675,21.545 21.672,21.542 20.824,21.542 20.645,21.364 20.645,20.098 20.435,19.888 19.2,19.888 ; 12.019,19.829 12.212,20.022 13.202,20.022 13.225,20.045 15.769,20.045 15.926,19.888 17.78,19.888 ; 13.485,11.037 13.525,11.037 14.776,12.289 14.776,12.328 16.027,13.58 16.114,13.666 16.114,14.062 ; 16.114,14.062 16.36,14.309 16.571,14.309 16.784,14.521 16.784,14.551 17.659,14.551 C25.1@17.704,14.596 ; C25.1@17.704,14.596 18.656,14.596 19.177,15.117 19.177,16.047 19.2,16.07 19.2,19.888 ; 17.78,19.888 19.2,19.888
V4V: C12.1 C13.1 C15.1 C16.2 C17.1 C22.2 D1.1 IC4.1 IC5.5 IC5.17 IC5.27 IC5.29 IC5.38 LED1.2 M2.3 P2.3 pad.15 pogo1.5 R15.1 R17.2 R21.2 R40.1 R41.1 | length 118.6
  Top Layer w0.216: pad.15@20.777,28.727 21.664,28.727
  Top Layer w0.254: C12.1@7.851,25.425 7.851,25.415 C12.1@8.024,25.242 ; 19.35,24.291 19.586,24.526 C22.2@19.586,24.536 ; 22.737,36.546 22.848,36.435 22.864,36.419 ; C13.1@23.52,19.211 23.62,19.211 C13.1@23.825,19.416 ; 25.106,19.416 25.203,19.514 ; v1@25.614,19.331 v1(25.706,19.24)
  Top Layer w0.305: C16.2@14.305,20.209 14.848,19.666 IC5.17@15.45,19.666 ; C17.1@17.452,14.732 17.519,14.732 17.662,14.876 17.662,15.145 18.35,15.833 IC5.27@18.35,16.341 ; IC5.29@19.35,15.969 19.35,15.695 19.973,15.072 19.973,14.861 C15.1@20.102,14.732 ; IC5.5@19.35,23.066 19.35,24.291 ; IC5.38@22.25,19.166 C13.1@23.274,19.166
  Top Layer w0.356: C12.1@8.024,25.242 C12.1@8.118,25.149 ; v1(9.627,23.749) 9.673,23.702 10.057,23.702 13.485,20.274 C16.2@13.908,20.274 ; C16.2@14.097,20.211 14.034,20.274 C16.2@13.908,20.274 ; 16.271,13.632 16.271,12.032 19.855,12.032 20.161,12.338 C15.1@20.161,14.693 ; 16.279,13.64 16.249,13.64 ; C17.1@17.452,14.732 17.452,14.705 17.312,14.566 17.175,14.566 16.249,13.64 ; C13.1@23.825,19.416 25.106,19.416 25.529,19.416 v1@25.614,19.331 ; v1(23.978,23.289) 24.065,23.201 24.065,23.154 25.203,22.015 25.203,19.514 ; C16.2@13.908,20.274 13.288,19.654 13.288,16.002 13.288,13.848 13.496,13.64 16.249,13.64
  Top Layer w0.381: IC4.1@8.118,24.308 C12.1@8.118,25.149
  Top Layer w0.508: C12.1@7.851,25.425 7.851,26.261 8.104,26.513 8.149,26.468 D1.1@10.207,26.468 ; M2.3@8.129,26.814 6.278,26.814 5.347,25.883 3.077,25.883 0.94,28.02 0.94,35.857 1.629,36.546 16.535,36.546 ; P2.3@16.612,35.255 16.535,35.331 16.535,36.546 ; C22.2@19.632,24.592 19.632,24.623 19.83,24.821 19.83,25.431 20.127,25.728 20.553,25.728 20.574,25.749 R15.1@20.574,25.774 20.574,25.801 20.604,25.831 20.725,25.831 21.495,26.602 21.826,26.602 v1(21.844,26.619) ; R21.2@19.748,30.741 20.244,30.741 ; R17.2@20.259,31.607 20.259,30.756 20.244,30.741 ; v1@21.826,26.662 21.826,26.702 21.825,26.703 21.825,30.404 ; 22.737,36.546 16.535,36.546 ; 22.848,31.75 22.848,31.737 ; 22.848,36.435 22.848,31.737 ; v1@23.181,30.081 23.163,30.081 22.848,30.397 22.848,31.737 ; 20.244,30.741 21.488,30.741 ; 21.488,30.741 21.852,30.741 ; 21.488,30.741 21.825,30.404 ; 21.825,30.404 21.825,30.714 21.852,30.741 ; 21.852,30.741 22.848,31.737
  Bottom Layer w0.254: R40.1@25.316,16.383 25.291,16.383 25.093,16.581 25.093,16.706 25.07,16.73 25.07,18.504 LED1.2@25.756,19.19 26.029,19.463 26.029,19.511 26.334,19.817 26.334,22.292 26.185,22.441 25.877,22.441 25.679,22.639 R41.1@25.679,22.641
  Bottom Layer w0.356: v1(21.844,26.619) 21.844,24.359 22.914,23.289 v1(23.978,23.289)
  Bottom Layer w0.508: v1@9.601,23.702 9.601,25.854 9.83,26.082 v1(9.83,26.162)
  other v1: 23.19,30.048
V5-SHIFT: C36.2 IC9.1 IC10.8 pad.22 Q5.2 R27.2 | length 24.3
  Top Layer w0.305: v1(11.963,2.573) 12.02,2.63 12.229,2.63 12.277,2.678 14.14,2.678 15.217,3.755 15.416,3.755 v1(15.473,3.811)
  Bottom Layer w0.305: R27.2@6.088,2.565 6.19,2.464 7.322,2.464 ; Q5.2@7.364,2.869 7.322,2.828 7.322,2.464 ; v1(11.963,2.573) 10.249,2.573 9.934,2.258 8.847,2.258 8.641,2.464 7.322,2.464 ; IC10.8@15.783,4.572 IC10.8@15.799,4.588 ; IC10.8@15.799,4.638 15.799,5.117 15.939,5.258 15.939,5.359 16.223,5.642 18.715,5.642 18.999,5.359 18.999,3.672 19.178,3.493 20.093,3.493 21.096,4.496 21.096,5.37 21.912,5.37 22.41,5.868 IC9.1@22.735,5.868 ; pad.22@22.047,3.785 22.2,4.064 23.012,4.877 23.012,5.727 22.865,5.874 IC9.1@22.749,5.874
V5V: C6.2 C7.2 C11.1 D1.3 IC3.1 IC3.2 IC4.6 L1.2 M3.2 R2.2 R16.2 | length 43.1
  Top Layer w0.3: C7.2@10.482,20.537 C7.2@10.482,20.814 ; C7.2@10.651,20.425 10.875,20.201 12.632,20.201 12.808,20.025 12.808,13.107 12.852,13.062 ; D1.3@11.982,25.558 D1.3@12.053,25.558 ; D1.3@12.307,25.558 12.188,25.558 D1.3@12.053,25.558 ; IC3.2@12.594,32.079 13.094,32.079 IC3.1@13.094,32.029 13.094,31.854 13.119,31.829 13.486,31.829 13.661,31.653 13.661,27.606 12.188,26.133 12.188,25.694 D1.3@12.053,25.558
  Top Layer w0.305: L1.2@7.771,17.551 7.771,18.751 8.219,19.199 8.385,19.199 9.39,20.204 10.43,20.204 C7.2@10.651,20.425 ; IC4.6@8.118,22.208 8.664,22.208 ; C6.2@8.661,14.732 8.661,14.445 C6.2@8.687,14.42 ; C11.1@9.202,22.53 9.185,22.53 9.017,22.697 9.017,25.196 9.196,25.375 11.798,25.375 D1.3@11.982,25.558 ; C11.1@9.319,22.403 9.319,22.393 9.171,22.245 9.161,22.245 9.124,22.208 8.664,22.208 ; C7.2@10.09,21.463 9.409,21.463 8.664,22.208 ; 12.852,13.062 14.268,11.647 R16.2@14.268,11.266 ; R16.2@14.319,11.215 14.295,11.215 14.295,10.524 M3.2@14.704,10.116 ; C7.2@10.1,21.196 10.482,20.814 10.482,21.189 10.1,21.571 C7.2@10.1,21.196
  Top Layer w0.508: R2.2@6.62,14.58 6.645,14.58 6.666,14.601 6.666,14.988 6.963,15.286 8.107,15.286 ; L1.2@7.721,17.551 8.331,16.941 8.331,15.236 8.281,15.286 8.107,15.286 ; C6.2@8.661,14.732 8.107,15.286
V12V: C2.2 C3.1 C4.2 C5.2 C26.2 IC1.9 IC1.10 IC2.2 IC9.2 M1.2 R3.2 R10.1 R32.2 R35.2 U1.7 Z1.3 | length 101.7
  Top Layer w0.305: C2.2@8.398,5.664 8.398,5.599 9.119,4.878 9.615,4.878 9.616,4.877 10.846,4.877
  Top Layer w0.381: v1(3.487,24.384) 3.529,24.342 3.529,24.187 3.546,24.17 3.546,17.973 3.184,17.611 1.652,17.611 0.965,16.924 0.965,11.278 3.213,9.03 3.213,8.795 5.935,6.073 7.054,6.073 ; v1(3.984,27.249) 3.984,27.355 4.003,27.374 4.003,30.089 4.439,30.525 4.755,30.525 v3(4.775,30.504) ; R3.2@7.239,6.257 7.239,6.182 7.477,5.944 8.183,5.944 8.398,5.729 C2.2@8.398,5.664 ; M1.2@7.501,4.037 7.501,3.837 7.61,3.728 7.869,3.728 10.366,1.231 11.114,0.483 22.445,0.483 22.572,0.61 v1(22.631,0.61) ; v1(8.106,32.193) 8.13,32.169 8.13,31.717 IC2.2@8.153,31.693 ; v3(25.933,3.81) 25.933,3.937 26.314,4.318 26.314,12.885 R10.1@26.238,12.961
  Top Layer w0.508: M1.2@7.501,4.037 8.247,4.784 8.247,5.513 C2.2@8.398,5.664 ; C3.1@8.293,7.01 8.539,7.256 8.539,7.446 9.652,8.56 9.652,9.016 ; C2.2@8.398,5.729 8.398,5.944 C3.1@8.398,7.05 ; C5.2@10.846,5.825 10.846,4.877 10.846,4.864 10.96,4.75 ; Z1.3@11.963,4.273 11.963,4.473 11.917,4.519 11.19,4.519 10.96,4.75 ; C4.2@12.031,5.756 11.966,5.756 10.96,4.75
  Bottom Layer w0.305: v3(4.775,30.504) 4.88,30.609 5.547,30.609 5.999,31.061 6.004,31.061 6.456,31.514 7.24,32.298
  Bottom Layer w0.381: v1(3.487,24.384) 3.487,24.443 3.353,24.578 3.353,26.618 v1(3.984,27.249) ; C26.2@7.061,33.359 7.061,32.766 7.061,32.225 7.171,32.334 U1.7@8.565,32.334 ; U1.7@9.156,32.334 U1.7@8.565,32.334 ; R35.2@14.508,28.55 14.484,28.573 13.787,28.573 13.564,28.796 13.564,31.111 11.913,32.762 11.913,33.844 11.689,34.067 10.945,34.067 10.766,34.247 8.226,34.247 7.823,33.844 7.823,33.095 8.397,32.521 8.397,32.503 U1.7@8.565,32.334 ; v1(22.631,0.61) 22.631,1.499 23.698,2.565 ; IC9.2@22.749,7.774 23.099,7.774 23.209,7.665 23.209,7.474 23.742,6.941 23.742,5.467 23.698,5.424 23.698,2.565 ; v3(25.933,3.81) 24.943,3.81 23.698,2.565
pads on no net: Conn1.1 Conn1.3 Conn1.8 Conn1.9 Conn1.11 Conn1.12 Conn1.13 Conn1.15 D1.2 IC1.11 IC2.6 IC3.5 IC3.7 IC4.2 IC4.5 IC5.14 IC5.15 IC5.16 IC5.19 IC5.20 IC5.21 IC5.23 IC5.24 IC5.25 IC5.26 IC5.30 IC5.35 IC5.36 IC5.40 IC5.41 IC5.42 IC5.43 IC5.44 IC6.2 IC6.6 IC6.7 IC6.12 IC6.13 IC6.15 IC6.19 IC6.28 IC6.31 IC6.32 IC6.35 IC6.44 IC6.47 pogo1.1 U1.8 Z1.2

## Polygon pours and split planes (outlines as drawn)
GND on Top Layer "GND_L01_P008" (solid, remove dead copper, pour order 8): 0.102,36.932 0.102,36.906 13.462,36.906 13.462,33.96 13.945,33.96 13.945,26.272 12.26,24.587 11.328,24.587 11.328,21.793 12.802,20.32 12.802,15.9 11.862,14.961 11.862,0.178 0.102,0.178 0.102,36.906
GND on Top Layer "GND_L01_P009" (solid, pour order 9): 18.288,15.189 19.629,15.192 19.629,12.268 16.689,12.268 16.689,13.85 18.029,15.189
GND on Bottom Layer "GND_L02_P001" (solid, remove dead copper, pour order 1): 0.102,36.424 12.04,36.424 27.737,36.424 27.737,0.479 12.751,0.479 0.102,0.479

## Silkscreen, mask and mechanical layers (free items; w line width, h text height)
Top Overlay:
  drawing of 6 lines, arcs and shapes, not listed
  text "+" at 6.833,35.484 h1.52
  text "V2.0" at 24.828,26.779 h1.14 r90
  text "2021" at 27.11,4.869 h1.14 r90
Bottom Overlay:
  lines w0.254: 7.861,36.271 10.274,36.271 ; 8.369,35.7 9.766,35.7 ; 8.623,35.154 9.512,35.154 ; 9.068,36.271 9.068,36.627 ; 13.157,1.448 15.57,1.448 ; 13.665,0.876 15.062,0.876 ; 13.919,0.33 14.808,0.33 ; 14.364,1.448 14.364,1.803
  text "+" at 5.69,35.23 h1.52
  text "4V" at 17.513,32.982 h1.14
  text "RX" at 19.723,32.982 h1.14
  text "TX" at 22.212,32.982 h1.14
  text "GPS" at 24.457,0.683 h1.14
  text "PWR" at 20.193,0.368 h1.14

## Text inside footprints (layer, text, board x,y; h text height)
Conn1: Top Overlay "1" at 5.922,5.903 h1.52 r90